# EAGLE board Infinity Mirror (EAGLE 9.3.0)
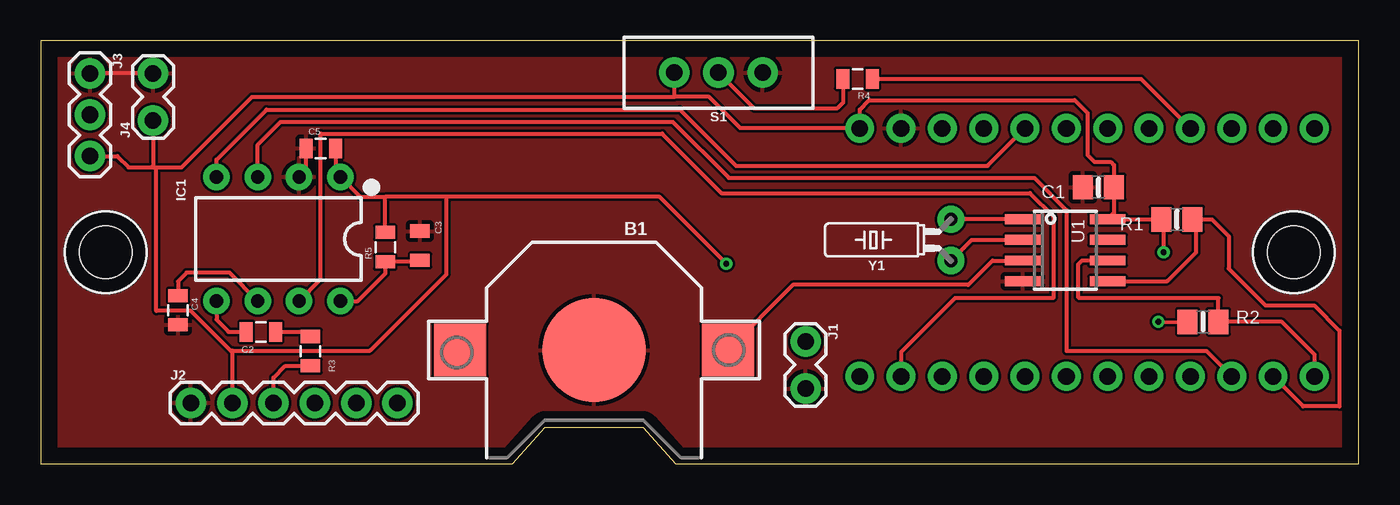
[diagram p0: board, top side]
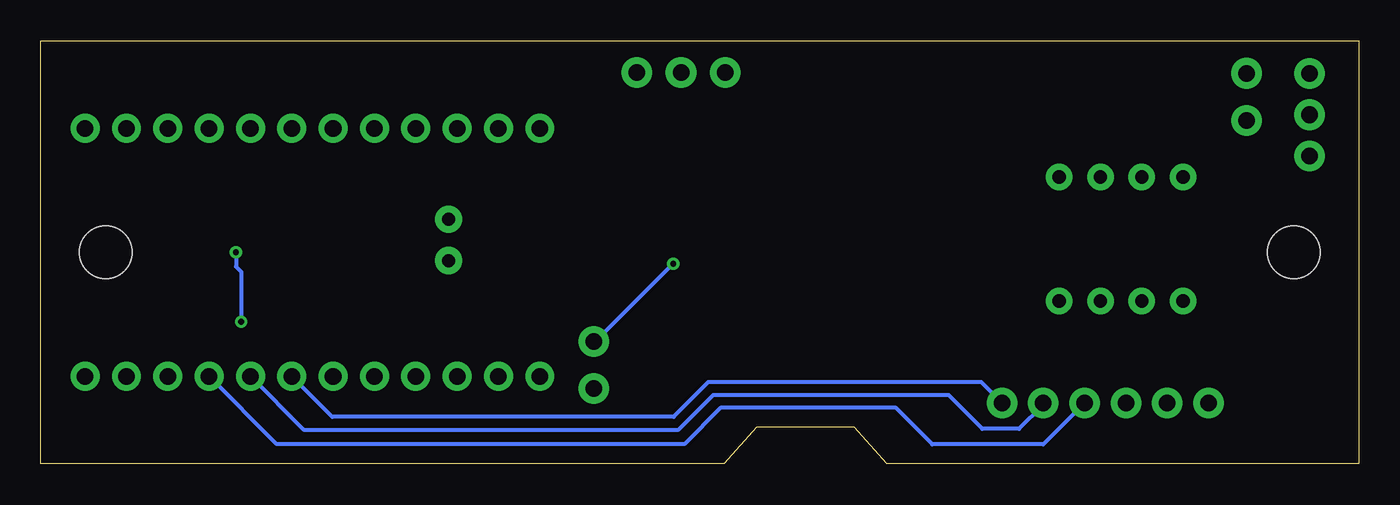
[diagram p1: board, bottom side, seen from below]

Size 81 x 26 mm. Coordinates in mm from the lower left corner, seen from the top.
Outline: 81,0 81,26 0,26 0,0 29,0 31,2.25 37,2.25 39,0 81,0
Copper layers (1*16): Top 0.035mm / dielectric 1.5mm / Bottom 0.035mm
Design rules "default *": minimum track width 6mil, minimum drill 0.35mm, track to track 6mil, track to pad 6mil, pad to pad 6mil, via to via 6mil, smd to smd 6mil, copper to edge 40mil, drill to drill 6mil, minimum pad ring 10mil, minimum via ring 8mil, stop-mask expansion 4mil, vias tented up to drill 0mil, thermal gap 10mil
Holes 3.2 mm at 77,13 4,13

## Footprints (pad centres in the part's own frame; a part is rotated, then mirrored left to right if it is on the bottom)
CR1220 = smd 3.2 x 3.2: +$1 -8.225,0; +$2 8.225,0 | smd 6.35 x 6.35: - 0,0
0805-NO = smd 1.24 x 1.5: 1 -0.95,0; 2 0.95,0
SPARKFUN-CAPACITORS_0805 = smd 0.8 x 1.2: 1 -0.9,0; 2 0.9,0
0805 = smd 0.8 x 1.2: 1 -0.9,0; 2 0.9,0
DIP08 = drill 0.813 pad 1.626: 1 -3.81,-3.81; 2 -1.27,-3.81; 3 1.27,-3.81; 4 3.81,-3.81; 5 3.81,3.81; 6 1.27,3.81; 7 -1.27,3.81; 8 -3.81,3.81
SPARKFUN-CONNECTORS_1X02_LOCK = drill 1.016 pad 1.88: 1 -0.178,0; 2 2.718,0
1X06 = drill 1.016 pad 1.88: 1 0,0; 2 2.54,0; 3 5.08,0; 4 7.62,0; 5 10.16,0; 6 12.7,0
1X03 = drill 1.016 pad 1.88: 1 0,0; 2 2.54,0; 3 5.08,0
SPARKFUN-PASSIVES_0805 = smd 0.8 x 1.2: 1 -0.9,0; 2 0.9,0
SWITCH_SPDT_PTH_11.6X4.0MM_LOCK = drill 1.016 pad 1.88: 1 0,2.718; 2 0,0; 3 0,-2.718
SOIC8_150MIL = smd 0.6 x 2.2: 1 -1.905,-2.6; 2 -0.635,-2.6; 3 0.635,-2.6; 4 1.905,-2.6; 5 1.905,2.6; 6 0.635,2.6; 7 -0.635,2.6; 8 -1.905,2.6
ARDUINO_PRO_TRINKET_5V_NO-DIMENSION = drill 1.016 pad 1.778: T4 7.62,8.89; T5V 7.62,19.05; T8 7.62,16.51; T12 -7.62,19.05; T13 -7.62,16.51; T-AR -7.62,13.97; TA0 -7.62,11.43; TA1 -7.62,8.89; TA2 -7.62,6.35; TA3 -7.62,3.81; TA4 -7.62,1.27; TA5 -7.62,-1.27; TBAT+ 7.62,26.67; TBUS 7.62,21.59; TG 7.62,24.13; TRST 7.62,-1.27; TRX 7.62,1.27; TTX 7.62,3.81; T~3 7.62,6.35; T~5 7.62,11.43; T~6 7.62,13.97; T~9 -7.62,26.67; T~10 -7.62,24.13; T~11 -7.62,21.59
CRYSTAL-PTH-2X6-CYL = drill 0.813 pad 1.676: 1 -1.27,0; 2 1.27,0

## Placement (x,y rotation side)
B1  CR1220  [CR1220]  34,7 180 top
C1  0.1uF  [0805-NO]  65,17 180 top
C2  0.01uF  [SPARKFUN-CAPACITORS_0805]  13.53,8.11 0 top
C3  33pF  [0805]  23.31,13.41 90 top
C4  0.1uF  [SPARKFUN-CAPACITORS_0805]  8.44,9.44 270 top
C5  0.1uF  [SPARKFUN-CAPACITORS_0805]  17.21,19.39 0 top
IC1  MSGEQ7P  [DIP08]  14.61,13.82 180 top
J1  Vsupply  [SPARKFUN-CONNECTORS_1X02_LOCK]  47,7.35 270 top
J2  AUDIO_POTS  [1X06]  9.23,3.75 0 top
J3  LED  [1X03]  3.03,23.99 270 top
J4  LED_CAP  [SPARKFUN-CONNECTORS_1X02_LOCK]  6.91,21.28 90 top
R1  10K  [0805-NO]  69.82,15.02 180 top
R2  10K  [0805-NO]  71.42,8.73 0 top
R3  22k  [SPARKFUN-PASSIVES_0805]  16.58,6.93 270 top
R4  220  [SPARKFUN-PASSIVES_0805]  50.2,23.65 180 top
R5  200k  [SPARKFUN-PASSIVES_0805]  21.17,13.32 90 top
S1  [SWITCH_SPDT_PTH_11.6X4.0MM_LOCK]  41.65,24.04 90 top
U1  DS1307  [SOIC8_150MIL]  62.96,13.13 270 top
U$1  ADAFRUIT_PRO_TRINKET_NO-DIMENSION  [ARDUINO_PRO_TRINKET_5V_NO-DIMENSION]  77,13 90 top
Y1  32.768kHz  [CRYSTAL-PTH-2X6-CYL]  55.94,13.76 90 top

## Library data of the parts
B1 C1 R1 R2 U1 = microbuilder
C2 C4 C5 = Terra_4.0_12_DIP_JJM_EB2_9-6-2018d
C3 = SparkFun-Capacitors; PROD_ID: CAP-08469; VALUE: 0.33µF
IC1 = SparkFun-IC-Special-Function; PROD_ID: IC-12196
J1 J4 R3-R5 = RC1a_Main_2-20-2018_m
J2 = SparkFun-Connectors; PROD_ID: CONN-08437
J3 = SparkFun-Connectors
S1 = SparkFun-Switches; PROD_ID: SWCH-08261; SF_SKU: COM-00102
U$1 = _111_IH
Y1 = SparkFun-Clocks; PROD_ID: XTAL-10112

## Nets
3: R4.2 S1.2
3-OUT: IC1.3 U$1.TA3
4-STROBE: IC1.4 U$1.T8
6-GND: C4.1 IC1.6
7-RESET: IC1.7 U$1.T~10
8-CKIN: C3.1 IC1.8 R5.1
AUDIO_IN: C2.1 IC1.5
DATA_OUT: J3.2
ELECTRET_AUDIO_OUT: J2.3 R3.2
GND: B1.- C1.2 C3.2 C4.2 C5.1 IC1.2 J1.2 J2.1 J3.1 J4.2 S1.3 U1.4 U$1.TG
N$8: C2.2 R3.1
POT_1: J2.6 U$1.TA0
POT_2: J2.5 U$1.TA1
POT_3: J2.4 U$1.TA2
SCL: R2.2 U1.6 U$1.TA5
SDA: R1.1 U1.5 U$1.TA4
SQW: U1.7
VBAT: B1.+$1 U1.3
VCC: C1.1 C5.2 IC1.1 J1.1 J2.2 J3.3 J4.1 R1.2 R2.1 R5.2 S1.1 U1.8 U$1.TBAT+
XI: U1.1 Y1.2
XO: U1.2 Y1.1
~3: R4.1 U$1.T~3

## Tracks (layer width: path | path; a pad name or v marks a point on that pad's centre or on a via)
3
  Top 0.254: S1.2 43.87,21.82 48.92,21.82 49.3,22.2 R4.2
3-OUT
  Top 0.254: IC1.3 13.34,19.62 14.74,21.02 38.84,21.02 42.29,17.57 61.05,17.57 63.03,15.59 63.03,6.95 71.62,6.95 U$1.TA3
4-STROBE
  Top 0.254: IC1.4 10.8,18.69 13.88,21.77 39.28,21.77 42.74,18.31 58.18,18.31 U$1.T8
6-GND
  Top 0.254: IC1.6 11.6,11.75 8.97,11.75 8.44,11.22 C4.1
7-RESET
  Top 0.254: IC1.7 17.21,11.34 17.21,20.29 38.19,20.29 41.84,16.64 60.79,16.64 62.23,15.2 62.23,10.19 56.19,10.19 52.87,6.87 U$1.T~10
8-CKIN
  Top 0.152: C3.1 23.22,12.42
  Top 0.254: 23.22,12.42 R5.1 21.17,11.69 19.49,10.01 IC1.8
AUDIO_IN
  Top 0.254: IC1.5 10.8,8.86 11.55,8.11 C2.1
ELECTRET_AUDIO_OUT
  Top 0.254: J2.3 14.31,5.31 15.03,6.03 R3.2
GND
  Top 0.152: J3.1
  Top 0.254: J4.2 J3.1 | IC1.2 arc90 16.31,18.06 C5.1
  pour Top: 0.01,26 0.01,0 81,0 81,26
N$8
  Top 0.254: C2.2 16.3,8.11 R3.1
POT_1
  Bottom 0.254: J2.6 23.22,5.04 39.96,5.04 42.11,2.89 63.08,2.89 U$1.TA0
POT_2
  Bottom 0.152: J2.5 19.39,3.65
  Bottom 0.254: 19.39,3.65 20.88,2.16 23.13,2.16 25.2,4.22 39.68,4.22 41.84,2.07 64.8,2.07 U$1.TA1
POT_3
  Bottom 0.254: J2.4 19.39,1.21 26.21,1.21 28.44,3.44 39.23,3.44 41.45,1.22 66.49,1.22 U$1.TA2
SCL
  Top 0.254: U$1.TA5 78.27,6.73 76.27,8.73 R2.2 72.37,10.18 63.82,10.18 63.75,10.25 63.75,12.25 63.99,12.49 U1.6
SDA
  Top 0.152: R1.1 71,15.02
  Top 0.254: U$1.TA4 77.58,3.53 79.81,3.53 79.81,8.19 78.26,9.74 75.26,9.74 73,12 73,14 71.98,15.02 R1.1 | U1.5 69.22,11.22 71,13 71,15.02
VBAT
  Top 0.254: B1.+$1 46.23,11 57,11 58.49,12.49 U1.3
VCC  (via drill 0.35)
  Top 0.152: U$1.TBAT+ | 6.91,18.33 7.02,18.22 7.1,18.14 | S1.1 | 38.93,22.55
  Top 0.254: 24.93,16.41 21.17,16.41 | 21.17,16.41 19.64,16.41 IC1.1 18.11,17.94 C5.2 | R5.2 21.17,16.41 | 11.77,6.85 11.77,6.96 20.23,6.96 24.93,11.66 24.93,16.41 | 11.77,6.85 J2.2 | 11.77,6.85 9.22,9.4 7.1,9.4 7.1,18.14 | U$1.TBAT+ 42.99,20.63 41.07,22.55 38.93,22.55 | U$1.TBAT+ 50.33,21.77 50.91,22.35 63.54,22.35 64.33,21.56 64.33,18.98 64.76,18.55 65.75,18.55 65.95,18.35 C1.1 65.95,15.43 U1.8 65.58,15.02 R1.2 69,14.89 v69,13 | J3.3 4.72,18.91 5.41,18.22 7.02,18.22 8.65,18.22 12.98,22.55 38.93,22.55 S1.1 | v42.13,12.3 38.02,16.41 24.93,16.41 | J4.1 6.91,18.33 | v68.68,8.73 R2.1
  Bottom 0.254: J1.1 46.9,7.53 v42.13,12.3 | v69,13 69,12.12 68.68,11.8 v68.68,8.73
XI
  Top 0.152: Y1.2
  Top 0.254: U1.1 Y1.2
XO
  Top 0.254: Y1.1 57.22,13.77 U1.2
~3
  Top 0.254: R4.1 67.62,23.65 U$1.T~3